# Altium PCB PCB4.PcbDoc (part 1 of 3)
Units mm, origin at the board's own origin, x right, y up, seen from the top; angles counter-clockwise.
Board outline 185.25 x 140.25 mm, 2 copper layers (Top Layer, Bottom Layer); 401 components, 60 nets, 1114 pads, 228 vias.
Unrouted connection lines stored in the file: 2.
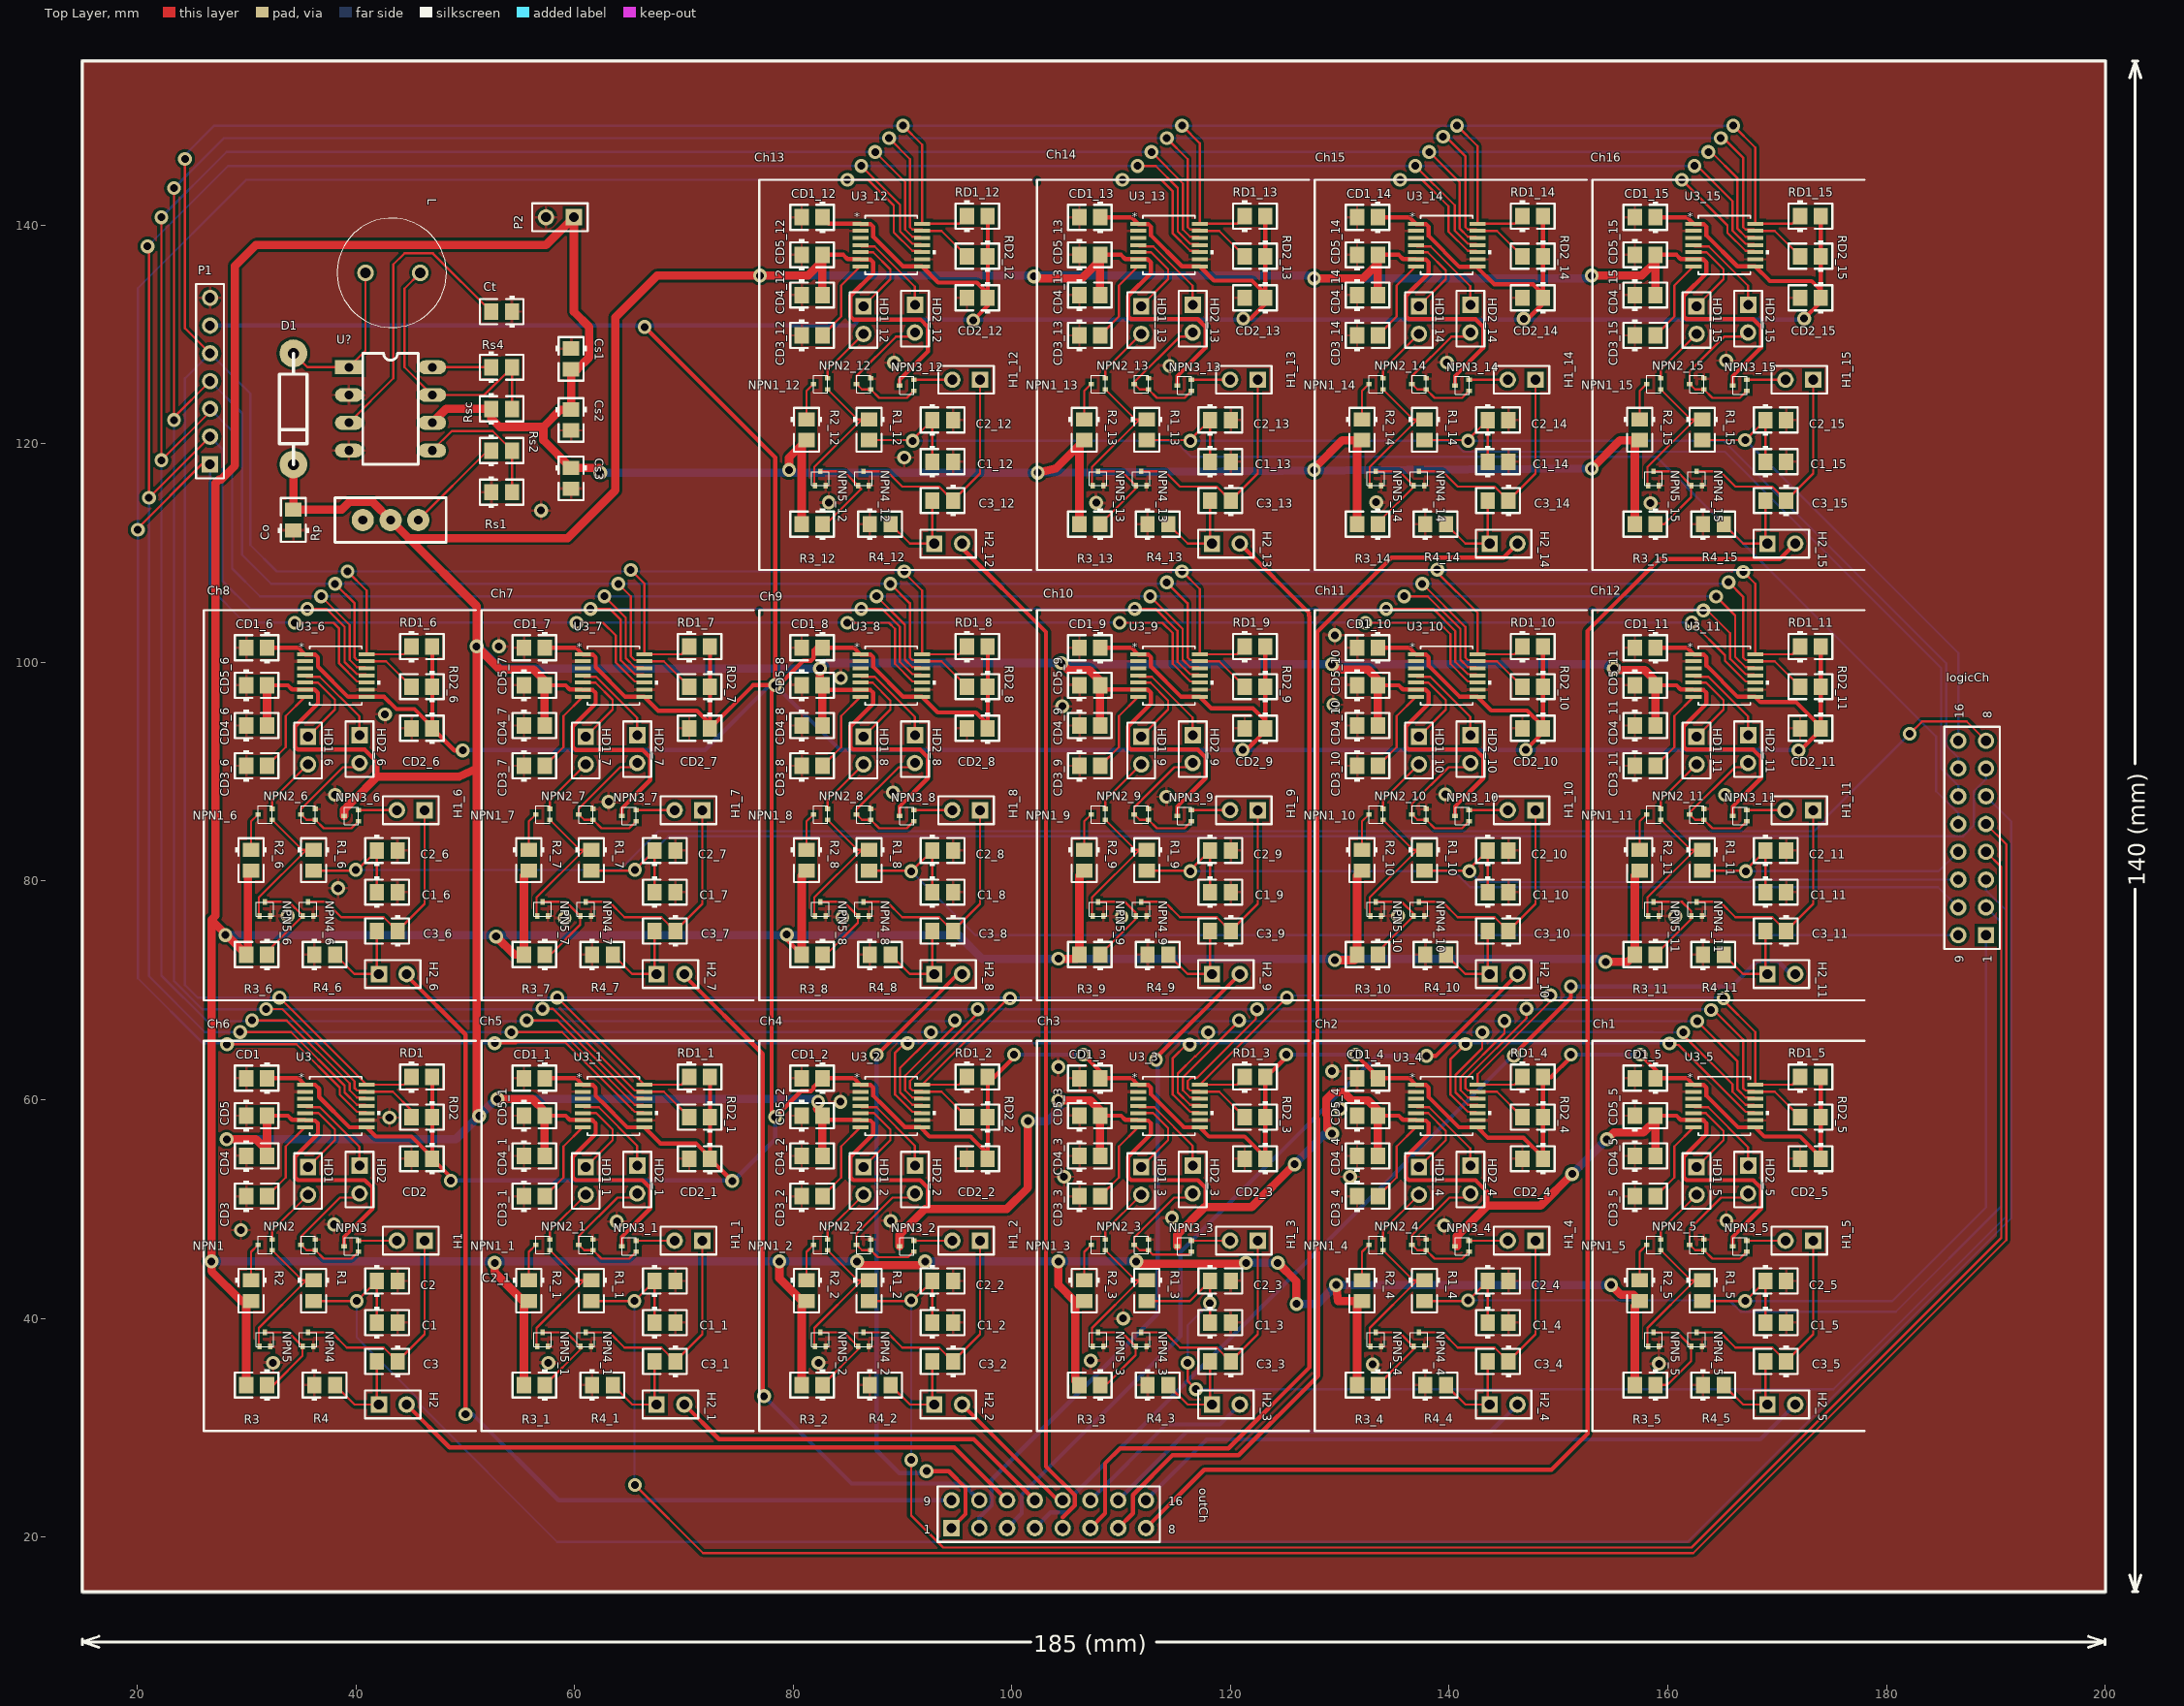
[diagram p0: Top Layer view]
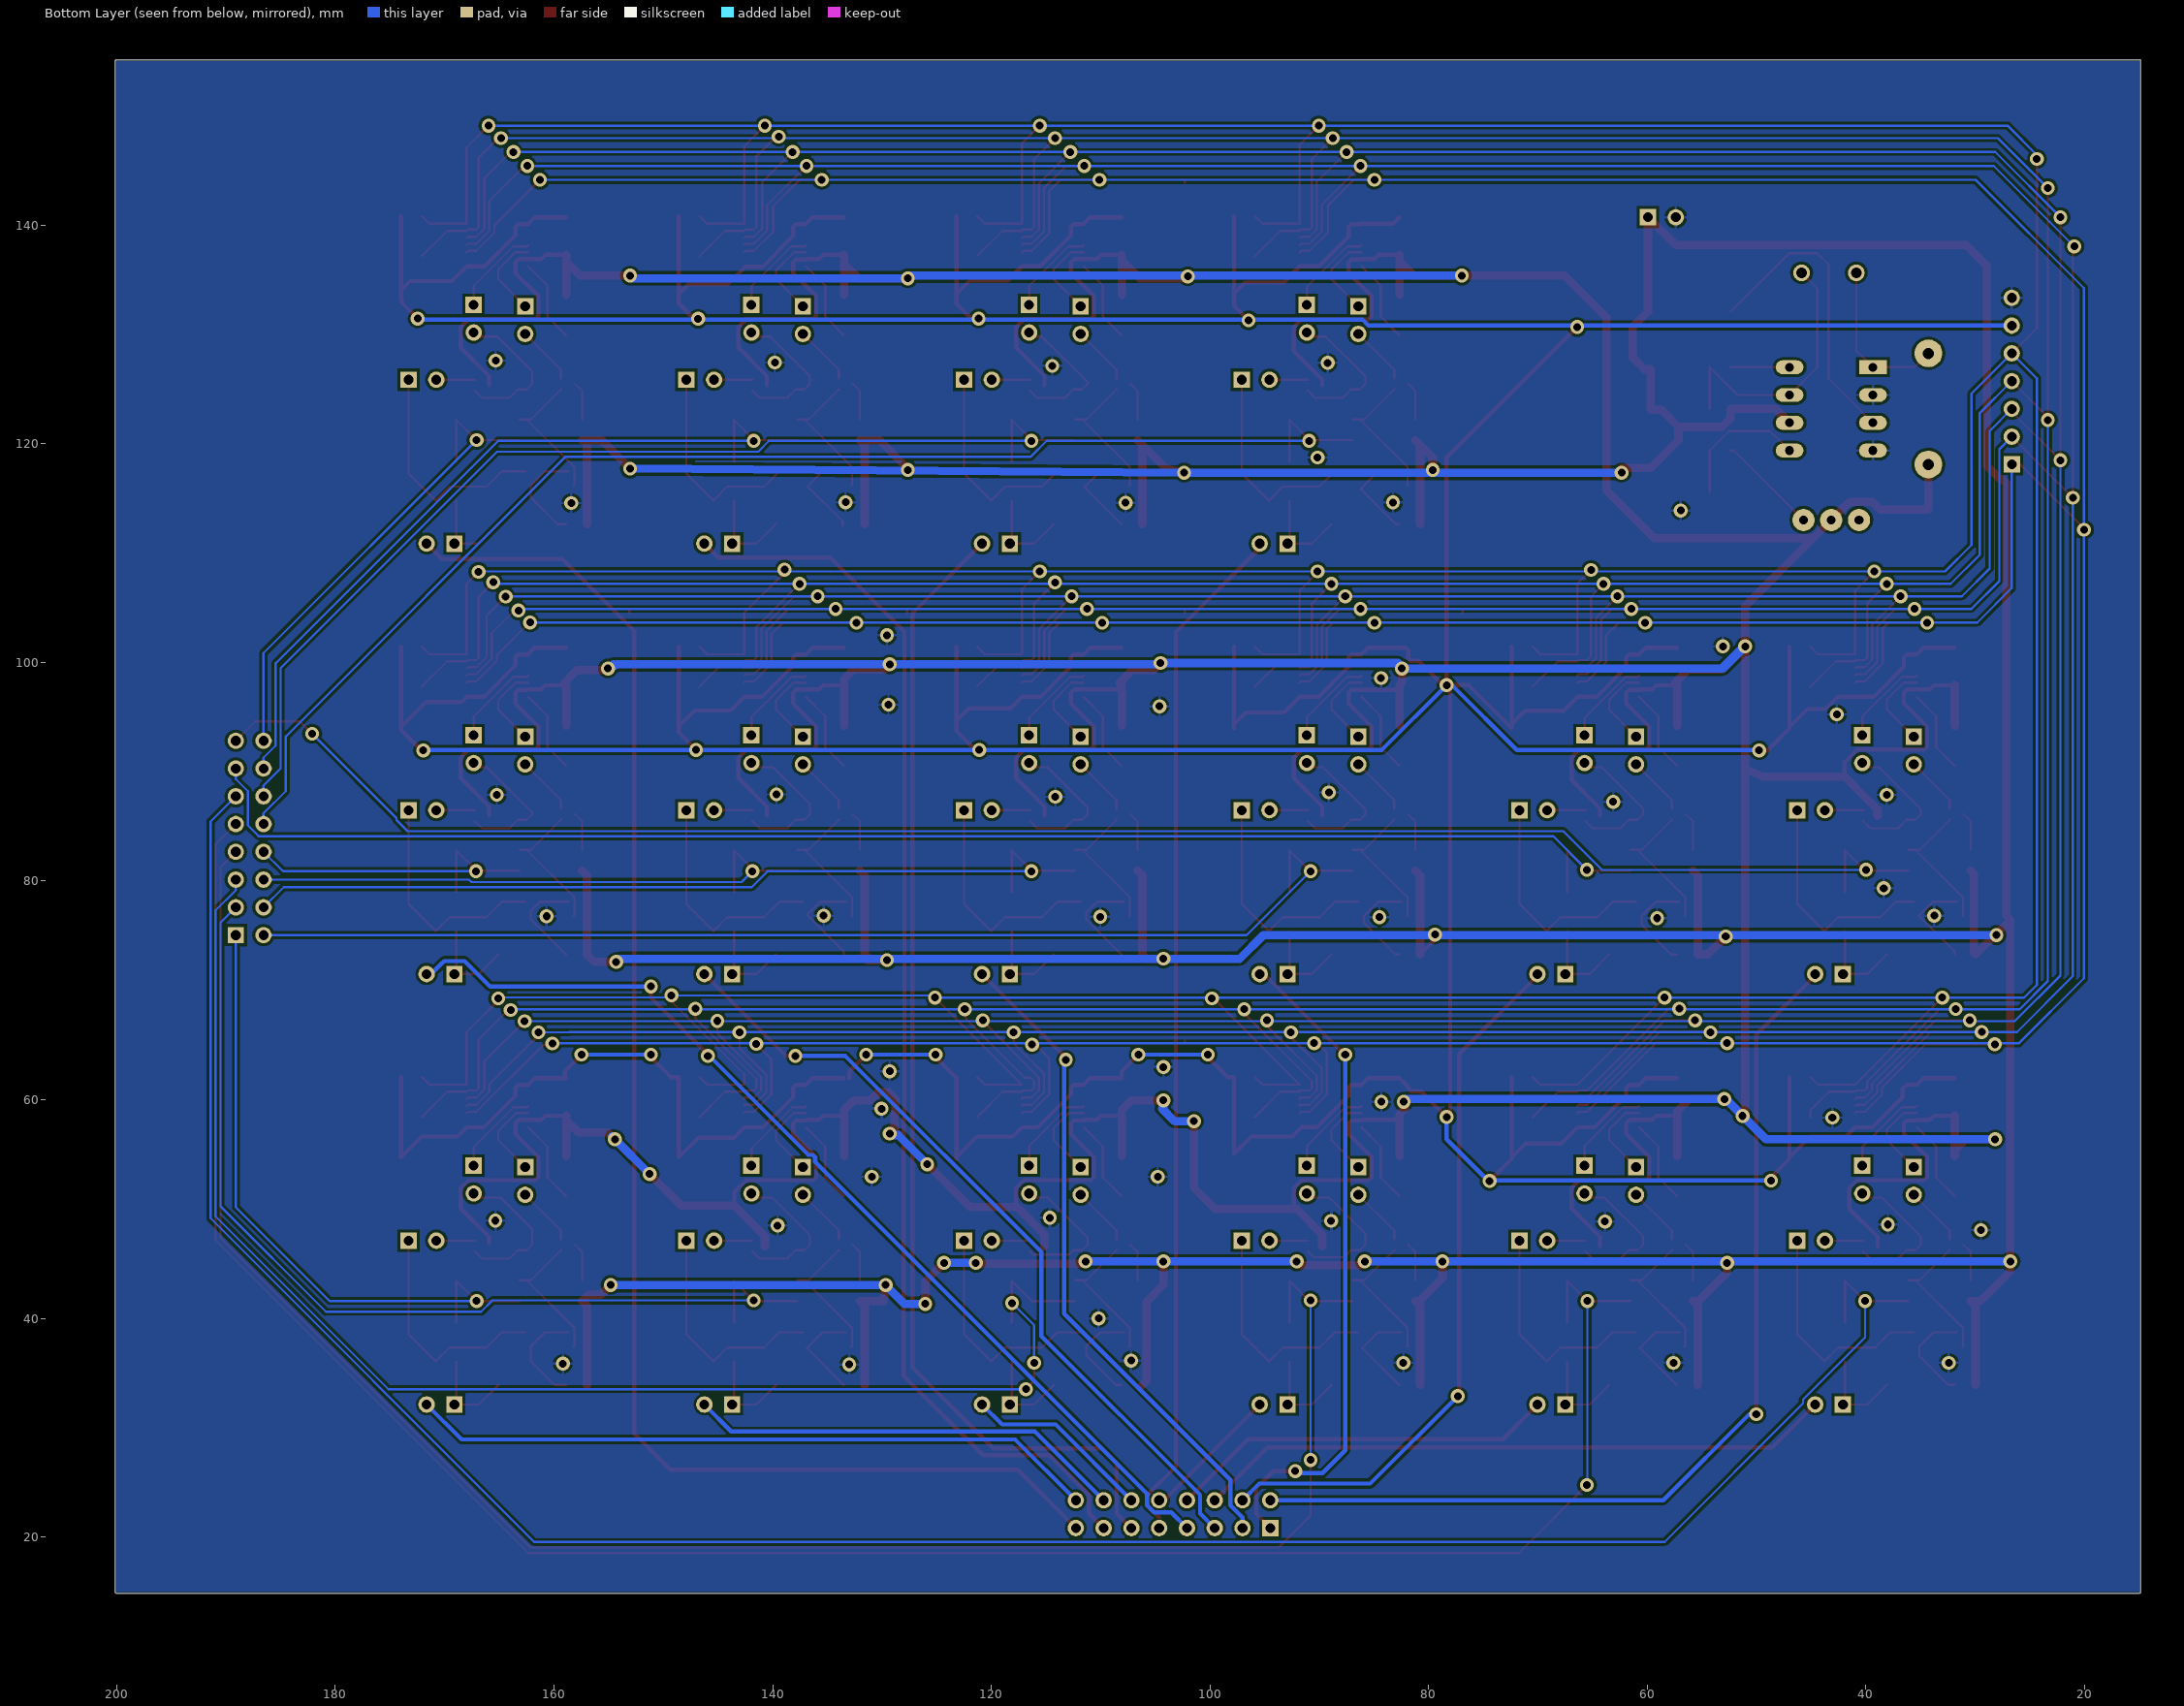
[diagram p1: Bottom Layer view, seen from below]

## Layer stack, top to bottom
Top Solder: solder mask 0.0102, Solder Resist, Dk 3.5
Top Layer: signal copper 0.0356
Dielectric 1: dielectric 0.32, FR-4, Dk 4.8
Bottom Layer: signal copper 0.0356
Bottom Solder: solder mask 0.0102, Solder Resist, Dk 3.5

## Board outline
15,14.873 cw(c15,15) 14.873,15 14.873,155 cw(c15,155) 15,155.127 200,155.127 cw(c200,155) 200.127,155 200.127,15 cw(c200,15) 200,14.873

## Design rules (kind name [scope] priority, off if disabled: settings)
Clearance [All] p1: gap=0.254
PolygonConnect [All] p1: connectstyle=Relief reliefconductorwidth=0.254 reliefentries=4 polygonreliefangle="90 Angle" airgapwidth=0.254
RoutingVias [All] p1: holewidth=0.711 width=1.27 viastyle="Through Hole" minholewidth=0.152 minwidth=1.27 maxholewidth=0.711 maxwidth=1.27
SolderMaskExpansion [All] p1: expansion=0.102
Width [All] p1: maxlimit=0.762 minlimit=0.152 preferedwidth=0.381
30 further rules are at their usual default settings.

## Classes and differential pairs
component class "4nd design": C1 C2 C3 CD1 CD2 CD3 CD4 CD5 H1 H2 HD1 HD2 logicCh NPN1 NPN2 NPN3 NPN4 NPN5 outCh P1 P2 R1 R2 R3 R4 RD1 RD2 U3
component class "Step-Up Converter": Co Cs1 Cs2 Cs3 Ct D1 L Rp Rs1 Rs2 Rs4 Rsc U?

## Components (designator, comment, footprint, x,y, rotation, side; value= is the part's Value field where it differs from the comment)
C1 "Cap-NP" CC2012-0805#1 42.87,39.621 r0 top
C1_1 "Cap-NP" CC2012-0805#1 68.27,39.621 r0 top (schematic designator C1)
C1_2 "Cap-NP" CC2012-0805#1 93.67,39.621 r0 top (schematic designator C1)
C1_3 "Cap-NP" CC2012-0805#1 119.07,39.621 r0 top (schematic designator C1)
C1_4 "Cap-NP" CC2012-0805#1 144.47,39.621 r0 top (schematic designator C1)
C1_5 "Cap-NP" CC2012-0805#1 169.87,39.621 r0 top (schematic designator C1)
C1_6 "Cap-NP" CC2012-0805#1 42.87,78.991 r0 top (schematic designator C1)
C1_7 "Cap-NP" CC2012-0805#1 68.27,78.991 r0 top (schematic designator C1)
C1_8 "Cap-NP" CC2012-0805#1 93.67,78.991 r0 top (schematic designator C1)
C1_9 "Cap-NP" CC2012-0805#1 119.07,78.991 r0 top (schematic designator C1)
C1_10 "Cap-NP" CC2012-0805#1 144.47,78.991 r0 top (schematic designator C1)
C1_11 "Cap-NP" CC2012-0805#1 169.87,78.991 r0 top (schematic designator C1)
C1_12 "Cap-NP" CC2012-0805#2 93.67,118.361 r0 top (schematic designator C1)
C1_13 "Cap-NP" CC2012-0805#1 119.07,118.361 r0 top (schematic designator C1)
C1_14 "Cap-NP" CC2012-0805#1 144.47,118.361 r0 top (schematic designator C1)
C1_15 "Cap-NP" CC2012-0805#1 169.87,118.361 r0 top (schematic designator C1)
C2 "Cap-NP" CC2012-0805#1 42.87,43.431 r0 top
C2_1 "Cap-NP" CC2012-0805#1 68.27,43.431 r0 top (schematic designator C2)
C2_2 "Cap-NP" CC2012-0805#1 93.67,43.431 r0 top (schematic designator C2)
C2_3 "Cap-NP" CC2012-0805#1 119.07,43.431 r0 top (schematic designator C2)
C2_4 "Cap-NP" CC2012-0805#1 144.47,43.431 r0 top (schematic designator C2)
C2_5 "Cap-NP" CC2012-0805#1 169.87,43.431 r0 top (schematic designator C2)
C2_6 "Cap-NP" CC2012-0805#1 42.87,82.801 r0 top (schematic designator C2)
C2_7 "Cap-NP" CC2012-0805#1 68.27,82.801 r0 top (schematic designator C2)
C2_8 "Cap-NP" CC2012-0805#1 93.67,82.801 r0 top (schematic designator C2)
C2_9 "Cap-NP" CC2012-0805#1 119.07,82.801 r0 top (schematic designator C2)
C2_10 "Cap-NP" CC2012-0805#1 144.47,82.801 r0 top (schematic designator C2)
C2_11 "Cap-NP" CC2012-0805#1 169.87,82.801 r0 top (schematic designator C2)
C2_12 "Cap-NP" CC2012-0805#1 93.67,122.171 r0 top (schematic designator C2)
C2_13 "Cap-NP" CC2012-0805#1 119.07,122.171 r0 top (schematic designator C2)
C2_14 "Cap-NP" CC2012-0805#1 144.47,122.171 r0 top (schematic designator C2)
C2_15 "Cap-NP" CC2012-0805#1 169.87,122.171 r0 top (schematic designator C2)
C3 "Cap-NP" CC2012-0805#1 42.87,36.065 r180 top
C3_1 "Cap-NP" CC2012-0805#1 68.27,36.065 r180 top (schematic designator C3)
C3_2 "Cap-NP" CC2012-0805#1 93.67,36.065 r180 top (schematic designator C3)
C3_3 "Cap-NP" CC2012-0805#1 119.07,36.065 r180 top (schematic designator C3)
C3_4 "Cap-NP" CC2012-0805#1 144.47,36.065 r180 top (schematic designator C3)
C3_5 "Cap-NP" CC2012-0805#1 169.87,36.065 r180 top (schematic designator C3)
C3_6 "Cap-NP" CC2012-0805#1 42.87,75.435 r180 top (schematic designator C3)
C3_7 "Cap-NP" CC2012-0805#1 68.27,75.435 r180 top (schematic designator C3)
C3_8 "Cap-NP" CC2012-0805#1 93.67,75.435 r180 top (schematic designator C3)
C3_9 "Cap-NP" CC2012-0805#1 119.07,75.435 r180 top (schematic designator C3)
C3_10 "Cap-NP" CC2012-0805#1 144.47,75.435 r180 top (schematic designator C3)
C3_11 "Cap-NP" CC2012-0805#1 169.87,75.435 r180 top (schematic designator C3)
C3_12 "Cap-NP" CC2012-0805#1 93.67,114.805 r180 top (schematic designator C3)
C3_13 "Cap-NP" CC2012-0805#1 119.07,114.805 r180 top (schematic designator C3)
C3_14 "Cap-NP" CC2012-0805#1 144.47,114.805 r180 top (schematic designator C3)
C3_15 "Cap-NP" CC2012-0805#1 169.87,114.805 r180 top (schematic designator C3)
CD1 "Cap-NP" CC2012-0805#1 30.932,61.973 r180 top
CD1_1 "Cap-NP" CC2012-0805#1 56.332,61.973 r180 top (schematic designator CD1)
CD1_2 "Cap-NP" CC2012-0805#1 81.732,61.973 r180 top (schematic designator CD1)
CD1_3 "Cap-NP" CC2012-0805#1 107.132,61.973 r180 top (schematic designator CD1)
CD1_4 "Cap-NP" CC2012-0805#1 132.532,61.973 r180 top (schematic designator CD1)
CD1_5 "Cap-NP" CC2012-0805#1 157.932,61.973 r180 top (schematic designator CD1)
CD1_6 "Cap-NP" CC2012-0805#1 30.932,101.343 r180 top (schematic designator CD1)
CD1_7 "Cap-NP" CC2012-0805#1 56.332,101.343 r180 top (schematic designator CD1)
CD1_8 "Cap-NP" CC2012-0805#1 81.732,101.343 r180 top (schematic designator CD1)
CD1_9 "Cap-NP" CC2012-0805#1 107.132,101.343 r180 top (schematic designator CD1)
CD1_10 "Cap-NP" CC2012-0805#1 132.532,101.343 r180 top (schematic designator CD1)
CD1_11 "Cap-NP" CC2012-0805#1 157.932,101.343 r180 top (schematic designator CD1)
CD1_12 "Cap-NP" CC2012-0805#1 81.732,140.713 r180 top (schematic designator CD1)
CD1_13 "Cap-NP" CC2012-0805#1 107.132,140.713 r180 top (schematic designator CD1)
CD1_14 "Cap-NP" CC2012-0805#1 132.532,140.713 r180 top (schematic designator CD1)
CD1_15 "Cap-NP" CC2012-0805#1 157.932,140.713 r180 top (schematic designator CD1)
CD2 "Cap-NP" CC2012-0805#1 46.045,54.607 r180 top
CD2_1 "Cap-NP" CC2012-0805#1 71.445,54.607 r180 top (schematic designator CD2)
CD2_2 "Cap-NP" CC2012-0805#1 96.845,54.607 r180 top (schematic designator CD2)
CD2_3 "Cap-NP" CC2012-0805#1 122.245,54.607 r180 top (schematic designator CD2)
CD2_4 "Cap-NP" CC2012-0805#1 147.645,54.607 r180 top (schematic designator CD2)
CD2_5 "Cap-NP" CC2012-0805#1 173.045,54.607 r180 top (schematic designator CD2)
CD2_6 "Cap-NP" CC2012-0805#1 46.045,93.977 r180 top (schematic designator CD2)
CD2_7 "Cap-NP" CC2012-0805#1 71.445,93.977 r180 top (schematic designator CD2)
CD2_8 "Cap-NP" CC2012-0805#1 96.845,93.977 r180 top (schematic designator CD2)
CD2_9 "Cap-NP" CC2012-0805#1 122.245,93.977 r180 top (schematic designator CD2)
CD2_10 "Cap-NP" CC2012-0805#1 147.645,93.977 r180 top (schematic designator CD2)
CD2_11 "Cap-NP" CC2012-0805#1 173.045,93.977 r180 top (schematic designator CD2)
CD2_12 "Cap-NP" CC2012-0805#1 96.845,133.347 r180 top (schematic designator CD2)
CD2_13 "Cap-NP" CC2012-0805#1 122.245,133.347 r180 top (schematic designator CD2)
CD2_14 "Cap-NP" CC2012-0805#1 147.645,133.347 r180 top (schematic designator CD2)
CD2_15 "Cap-NP" CC2012-0805#1 173.045,133.347 r180 top (schematic designator CD2)
CD3 "Cap-NP" CC2012-0805#1 30.932,51.178 r0 top
CD3_1 "Cap-NP" CC2012-0805#1 56.332,51.178 r0 top (schematic designator CD3)
CD3_2 "Cap-NP" CC2012-0805#1 81.732,51.178 r0 top (schematic designator CD3)
CD3_3 "Cap-NP" CC2012-0805#1 107.132,51.178 r0 top (schematic designator CD3)
CD3_4 "Cap-NP" CC2012-0805#1 132.532,51.178 r0 top (schematic designator CD3)
CD3_5 "Cap-NP" CC2012-0805#1 157.932,51.178 r0 top (schematic designator CD3)
CD3_6 "Cap-NP" CC2012-0805#1 30.932,90.548 r0 top (schematic designator CD3)
CD3_7 "Cap-NP" CC2012-0805#1 56.332,90.548 r0 top (schematic designator CD3)
CD3_8 "Cap-NP" CC2012-0805#1 81.732,90.548 r0 top (schematic designator CD3)
CD3_9 "Cap-NP" CC2012-0805#1 107.132,90.548 r0 top (schematic designator CD3)
CD3_10 "Cap-NP" CC2012-0805#1 132.532,90.548 r0 top (schematic designator CD3)
CD3_11 "Cap-NP" CC2012-0805#1 157.932,90.548 r0 top (schematic designator CD3)
CD3_12 "Cap-NP" CC2012-0805#1 81.732,129.918 r0 top (schematic designator CD3)
CD3_13 "Cap-NP" CC2012-0805#1 107.132,129.918 r0 top (schematic designator CD3)
CD3_14 "Cap-NP" CC2012-0805#1 132.532,129.918 r0 top (schematic designator CD3)
CD3_15 "Cap-NP" CC2012-0805#1 157.932,129.918 r0 top (schematic designator CD3)
CD4 "Cap-NP" CC2012-0805#1 30.932,54.861 r0 top
CD4_1 "Cap-NP" CC2012-0805#1 56.332,54.861 r0 top (schematic designator CD4)
CD4_2 "Cap-NP" CC2012-0805#1 81.732,54.861 r0 top (schematic designator CD4)
CD4_3 "Cap-NP" CC2012-0805#1 107.132,54.861 r0 top (schematic designator CD4)
CD4_4 "Cap-NP" CC2012-0805#1 132.532,54.861 r0 top (schematic designator CD4)
CD4_5 "Cap-NP" CC2012-0805#1 157.932,54.861 r0 top (schematic designator CD4)
CD4_6 "Cap-NP" CC2012-0805#1 30.932,94.231 r0 top (schematic designator CD4)
CD4_7 "Cap-NP" CC2012-0805#1 56.332,94.231 r0 top (schematic designator CD4)
CD4_8 "Cap-NP" CC2012-0805#1 81.732,94.231 r0 top (schematic designator CD4)
CD4_9 "Cap-NP" CC2012-0805#1 107.132,94.231 r0 top (schematic designator CD4)
CD4_10 "Cap-NP" CC2012-0805#1 132.532,94.231 r0 top (schematic designator CD4)
CD4_11 "Cap-NP" CC2012-0805#1 157.932,94.231 r0 top (schematic designator CD4)
CD4_12 "Cap-NP" CC2012-0805#1 81.732,133.601 r0 top (schematic designator CD4)
CD4_13 "Cap-NP" CC2012-0805#1 107.132,133.601 r0 top (schematic designator CD4)
CD4_14 "Cap-NP" CC2012-0805#1 132.532,133.601 r0 top (schematic designator CD4)
CD4_15 "Cap-NP" CC2012-0805#1 157.932,133.601 r0 top (schematic designator CD4)
CD5 "Cap-NP" CC2012-0805#1 30.932,58.544 r0 top
CD5_1 "Cap-NP" CC2012-0805#1 56.332,58.544 r0 top (schematic designator CD5)
CD5_2 "Cap-NP" CC2012-0805#1 81.732,58.544 r0 top (schematic designator CD5)
CD5_3 "Cap-NP" CC2012-0805#1 107.132,58.544 r0 top (schematic designator CD5)
CD5_4 "Cap-NP" CC2012-0805#1 132.532,58.544 r0 top (schematic designator CD5)
CD5_5 "Cap-NP" CC2012-0805#1 157.932,58.544 r0 top (schematic designator CD5)
CD5_6 "Cap-NP" CC2012-0805#1 30.932,97.914 r0 top (schematic designator CD5)
CD5_7 "Cap-NP" CC2012-0805#1 56.332,97.914 r0 top (schematic designator CD5)
CD5_8 "Cap-NP" CC2012-0805#1 81.732,97.914 r0 top (schematic designator CD5)
CD5_9 "Cap-NP" CC2012-0805#1 107.132,97.914 r0 top (schematic designator CD5)
CD5_10 "Cap-NP" CC2012-0805#1 132.532,97.914 r0 top (schematic designator CD5)
CD5_11 "Cap-NP" CC2012-0805#1 157.932,97.914 r0 top (schematic designator CD5)
CD5_12 "Cap-NP" CC2012-0805#1 81.732,137.284 r0 top (schematic designator CD5)
CD5_13 "Cap-NP" CC2012-0805#1 107.132,137.284 r0 top (schematic designator CD5)
CD5_14 "Cap-NP" CC2012-0805#1 132.532,137.284 r0 top (schematic designator CD5)
CD5_15 "Cap-NP" CC2012-0805#1 157.932,137.284 r0 top (schematic designator CD5)
Co "Cap-NP" CC2012-0805#1 34.29,113.03 r90 top
Cs1 "Cap-NP" CC2012-0805#1 59.689,127.762 r270 top
Cs2 "Cap-NP" CC2012-0805#1 59.689,122.174 r270 top
Cs3 "Cap-NP" CC2012-0805#1 59.689,116.84 r270 top
Ct "Cap-NP" CC2012-0805#1 53.34,132.08 r180 top
D1 "DIODE" D1N40XX 34.29,118.11 r90 top
H1 "Header 1" HDR1X2 46.299,47.114 r180 top
H1_1 "Header 1" HDR1X2 71.699,47.114 r180 top (schematic designator H1)
H1_2 "Header 1" HDR1X2 97.099,47.114 r180 top (schematic designator H1)
H1_3 "Header 1" HDR1X2 122.499,47.114 r180 top (schematic designator H1)
H1_4 "Header 1" HDR1X2 147.899,47.114 r180 top (schematic designator H1)
H1_5 "Header 1" HDR1X2 173.299,47.114 r180 top (schematic designator H1)
H1_6 "Header 1" HDR1X2 46.299,86.484 r180 top (schematic designator H1)
H1_7 "Header 1" HDR1X2 71.699,86.484 r180 top (schematic designator H1)
H1_8 "Header 1" HDR1X2 97.099,86.484 r180 top (schematic designator H1)
H1_9 "Header 1" HDR1X2 122.499,86.484 r180 top (schematic designator H1)
H1_10 "Header 1" HDR1X2 147.899,86.484 r180 top (schematic designator H1)
H1_11 "Header 1" HDR1X2 173.299,86.484 r180 top (schematic designator H1)
H1_12 "Header 1" HDR1X2 97.099,125.854 r180 top (schematic designator H1)
H1_13 "Header 1" HDR1X2 122.499,125.854 r180 top (schematic designator H1)
H1_14 "Header 1" HDR1X2 147.899,125.854 r180 top (schematic designator H1)
H1_15 "Header 1" HDR1X2 173.299,125.854 r180 top (schematic designator H1)
H2 "Header 2" HDR1X2 42.108,32.128 r0 top
H2_1 "Header 2" HDR1X2 67.508,32.128 r0 top (schematic designator H2)
H2_2 "Header 2" HDR1X2 92.908,32.128 r0 top (schematic designator H2)
H2_3 "Header 2" HDR1X2 118.308,32.128 r0 top (schematic designator H2)
H2_4 "Header 2" HDR1X2 143.708,32.128 r0 top (schematic designator H2)
H2_5 "Header 2" HDR1X2 169.108,32.128 r0 top (schematic designator H2)
H2_6 "Header 2" HDR1X2 42.108,71.498 r0 top (schematic designator H2)
H2_7 "Header 2" HDR1X2 67.508,71.498 r0 top (schematic designator H2)
H2_8 "Header 2" HDR1X2 92.908,71.498 r0 top (schematic designator H2)
H2_9 "Header 2" HDR1X2 118.308,71.498 r0 top (schematic designator H2)
H2_10 "Header 2" HDR1X2 143.708,71.498 r0 top (schematic designator H2)
H2_11 "Header 2" HDR1X2 169.108,71.498 r0 top (schematic designator H2)
H2_12 "Header 2" HDR1X2 92.908,110.868 r0 top (schematic designator H2)
H2_13 "Header 2" HDR1X2 118.308,110.868 r0 top (schematic designator H2)
H2_14 "Header 2" HDR1X2 143.708,110.868 r0 top (schematic designator H2)
H2_15 "Header 2" HDR1X2 169.108,110.868 r0 top (schematic designator H2)
HD1 "HD1" HDR1X2 35.631,53.845 r270 top
HD1_1 "HD1" HDR1X2 61.031,53.845 r270 top (schematic designator HD1)
HD1_2 "HD1" HDR1X2 86.431,53.845 r270 top (schematic designator HD1)
HD1_3 "HD1" HDR1X2 111.831,53.845 r270 top (schematic designator HD1)
HD1_4 "HD1" HDR1X2 137.231,53.845 r270 top (schematic designator HD1)
HD1_5 "HD1" HDR1X2 162.631,53.845 r270 top (schematic designator HD1)
HD1_6 "HD1" HDR1X2 35.631,93.215 r270 top (schematic designator HD1)
HD1_7 "HD1" HDR1X2 61.031,93.215 r270 top (schematic designator HD1)
HD1_8 "HD1" HDR1X2 86.431,93.215 r270 top (schematic designator HD1)
HD1_9 "HD1" HDR1X2 111.831,93.215 r270 top (schematic designator HD1)
HD1_10 "HD1" HDR1X2 137.231,93.215 r270 top (schematic designator HD1)
HD1_11 "HD1" HDR1X2 162.631,93.215 r270 top (schematic designator HD1)
HD1_12 "HD1" HDR1X2 86.431,132.585 r270 top (schematic designator HD1)
HD1_13 "HD1" HDR1X2 111.831,132.585 r270 top (schematic designator HD1)
HD1_14 "HD1" HDR1X2 137.231,132.585 r270 top (schematic designator HD1)
HD1_15 "HD1" HDR1X2 162.631,132.585 r270 top (schematic designator HD1)
HD2 "HD2" HDR1X2 40.342,53.972 r270 top
HD2_1 "HD2" HDR1X2 65.742,53.972 r270 top (schematic designator HD2)
HD2_2 "HD2" HDR1X2 91.142,53.972 r270 top (schematic designator HD2)
HD2_3 "HD2" HDR1X2 116.542,53.972 r270 top (schematic designator HD2)
HD2_4 "HD2" HDR1X2 141.942,53.972 r270 top (schematic designator HD2)
HD2_5 "HD2" HDR1X2 167.342,53.972 r270 top (schematic designator HD2)
HD2_6 "HD2" HDR1X2 40.342,93.342 r270 top (schematic designator HD2)
HD2_7 "HD2" HDR1X2 65.742,93.342 r270 top (schematic designator HD2)
HD2_8 "HD2" HDR1X2 91.142,93.342 r270 top (schematic designator HD2)
HD2_9 "HD2" HDR1X2 116.542,93.342 r270 top (schematic designator HD2)
HD2_10 "HD2" HDR1X2 141.942,93.342 r270 top (schematic designator HD2)
HD2_11 "HD2" HDR1X2 167.342,93.342 r270 top (schematic designator HD2)
HD2_12 "HD2" HDR1X2 91.142,132.712 r270 top (schematic designator HD2)
HD2_13 "HD2" HDR1X2 116.542,132.712 r270 top (schematic designator HD2)
HD2_14 "HD2" HDR1X2 141.942,132.712 r270 top (schematic designator HD2)
HD2_15 "HD2" HDR1X2 167.342,132.712 r270 top (schematic designator HD2)
L "Component_1" PCBComponent_1 40.894,135.636 r0 top
logicCh "Header 8X2A" HDR2X8_CEN 189.103,75.057 r90 top
NPN1 "MMBT3904T" MMBT3904T 31.059,46.733 r90 top
NPN1_1 "MMBT3904T" MMBT3904T 56.459,46.733 r90 top (schematic designator NPN1)
NPN1_2 "MMBT3904T" MMBT3904T 81.859,46.733 r90 top (schematic designator NPN1)
NPN1_3 "MMBT3904T" MMBT3904T 107.259,46.733 r90 top (schematic designator NPN1)
NPN1_4 "MMBT3904T" MMBT3904T 132.659,46.733 r90 top (schematic designator NPN1)
NPN1_5 "MMBT3904T" MMBT3904T 158.059,46.733 r90 top (schematic designator NPN1)
NPN1_6 "MMBT3904T" MMBT3904T 31.059,86.103 r90 top (schematic designator NPN1)
NPN1_7 "MMBT3904T" MMBT3904T 56.459,86.103 r90 top (schematic designator NPN1)
NPN1_8 "MMBT3904T" MMBT3904T 81.859,86.103 r90 top (schematic designator NPN1)
NPN1_9 "MMBT3904T" MMBT3904T 107.259,86.103 r90 top (schematic designator NPN1)
NPN1_10 "MMBT3904T" MMBT3904T 132.659,86.103 r90 top (schematic designator NPN1)
NPN1_11 "MMBT3904T" MMBT3904T 158.059,86.103 r90 top (schematic designator NPN1)
NPN1_12 "MMBT3904T" MMBT3904T 81.859,125.473 r90 top (schematic designator NPN1)
NPN1_13 "MMBT3904T" MMBT3904T 107.259,125.473 r90 top (schematic designator NPN1)
NPN1_14 "MMBT3904T" MMBT3904T 132.659,125.473 r90 top (schematic designator NPN1)
NPN1_15 "MMBT3904T" MMBT3904T 158.059,125.473 r90 top (schematic designator NPN1)
NPN2 "MMBT3904T" MMBT3904T 34.996,46.733 r90 top
NPN2_1 "MMBT3904T" MMBT3904T 60.396,46.733 r90 top (schematic designator NPN2)
NPN2_2 "MMBT3904T" MMBT3904T 85.796,46.733 r90 top (schematic designator NPN2)
NPN2_3 "MMBT3904T" MMBT3904T 111.196,46.733 r90 top (schematic designator NPN2)
NPN2_4 "MMBT3904T" MMBT3904T 136.596,46.733 r90 top (schematic designator NPN2)
NPN2_5 "MMBT3904T" MMBT3904T 161.996,46.733 r90 top (schematic designator NPN2)
NPN2_6 "MMBT3904T" MMBT3904T 34.996,86.103 r90 top (schematic designator NPN2)
NPN2_7 "MMBT3904T" MMBT3904T 60.396,86.103 r90 top (schematic designator NPN2)
NPN2_8 "MMBT3904T" MMBT3904T 85.796,86.103 r90 top (schematic designator NPN2)
NPN2_9 "MMBT3904T" MMBT3904T 111.196,86.103 r90 top (schematic designator NPN2)
NPN2_10 "MMBT3904T" MMBT3904T 136.596,86.103 r90 top (schematic designator NPN2)
NPN2_11 "MMBT3904T" MMBT3904T 161.996,86.103 r90 top (schematic designator NPN2)
NPN2_12 "MMBT3904T" MMBT3904T 85.796,125.473 r90 top (schematic designator NPN2)
NPN2_13 "MMBT3904T" MMBT3904T 111.196,125.473 r90 top (schematic designator NPN2)
NPN2_14 "MMBT3904T" MMBT3904T 136.596,125.473 r90 top (schematic designator NPN2)
NPN2_15 "MMBT3904T" MMBT3904T 161.996,125.473 r90 top (schematic designator NPN2)
NPN3 "MMBT3904T" MMBT3904T 38.933,46.606 r90 top
NPN3_1 "MMBT3904T" MMBT3904T 64.333,46.606 r90 top (schematic designator NPN3)
NPN3_2 "MMBT3904T" MMBT3904T 89.733,46.606 r90 top (schematic designator NPN3)
NPN3_3 "MMBT3904T" MMBT3904T 115.133,46.606 r90 top (schematic designator NPN3)
NPN3_4 "MMBT3904T" MMBT3904T 140.533,46.606 r90 top (schematic designator NPN3)
NPN3_5 "MMBT3904T" MMBT3904T 165.933,46.606 r90 top (schematic designator NPN3)
NPN3_6 "MMBT3904T" MMBT3904T 38.933,85.976 r90 top (schematic designator NPN3)
NPN3_7 "MMBT3904T" MMBT3904T 64.333,85.976 r90 top (schematic designator NPN3)
NPN3_8 "MMBT3904T" MMBT3904T 89.733,85.976 r90 top (schematic designator NPN3)
NPN3_9 "MMBT3904T" MMBT3904T 115.133,85.976 r90 top (schematic designator NPN3)
NPN3_10 "MMBT3904T" MMBT3904T 140.533,85.976 r90 top (schematic designator NPN3)
NPN3_11 "MMBT3904T" MMBT3904T 165.933,85.976 r90 top (schematic designator NPN3)
NPN3_12 "MMBT3904T" MMBT3904T 89.733,125.346 r90 top (schematic designator NPN3)
NPN3_13 "MMBT3904T" MMBT3904T 115.133,125.346 r90 top (schematic designator NPN3)
NPN3_14 "MMBT3904T" MMBT3904T 140.533,125.346 r90 top (schematic designator NPN3)
NPN3_15 "MMBT3904T" MMBT3904T 165.933,125.346 r90 top (schematic designator NPN3)
NPN4 "MMBT3904T" MMBT3904T 35.631,38.732 r0 top
NPN4_1 "MMBT3904T" MMBT3904T 61.031,38.732 r0 top (schematic designator NPN4)
NPN4_2 "MMBT3904T" MMBT3904T 86.431,38.732 r0 top (schematic designator NPN4)
NPN4_3 "MMBT3904T" MMBT3904T 111.831,38.732 r0 top (schematic designator NPN4)
NPN4_4 "MMBT3904T" MMBT3904T 137.231,38.732 r0 top (schematic designator NPN4)
NPN4_5 "MMBT3904T" MMBT3904T 162.631,38.732 r0 top (schematic designator NPN4)
NPN4_6 "MMBT3904T" MMBT3904T 35.631,78.102 r0 top (schematic designator NPN4)
NPN4_7 "MMBT3904T" MMBT3904T 61.031,78.102 r0 top (schematic designator NPN4)
NPN4_8 "MMBT3904T" MMBT3904T 86.431,78.102 r0 top (schematic designator NPN4)
NPN4_9 "MMBT3904T" MMBT3904T 111.831,78.102 r0 top (schematic designator NPN4)
NPN4_10 "MMBT3904T" MMBT3904T 137.231,78.102 r0 top (schematic designator NPN4)
NPN4_11 "MMBT3904T" MMBT3904T 162.631,78.102 r0 top (schematic designator NPN4)
NPN4_12 "MMBT3904T" MMBT3904T 86.431,117.472 r0 top (schematic designator NPN4)
NPN4_13 "MMBT3904T" MMBT3904T 111.831,117.472 r0 top (schematic designator NPN4)
NPN4_14 "MMBT3904T" MMBT3904T 137.231,117.472 r0 top (schematic designator NPN4)
NPN4_15 "MMBT3904T" MMBT3904T 162.631,117.472 r0 top (schematic designator NPN4)
NPN5 "MMBT3904T" MMBT3904T 31.694,38.732 r0 top
NPN5_1 "MMBT3904T" MMBT3904T 57.094,38.732 r0 top (schematic designator NPN5)
NPN5_2 "MMBT3904T" MMBT3904T 82.494,38.732 r0 top (schematic designator NPN5)
NPN5_3 "MMBT3904T" MMBT3904T 107.894,38.732 r0 top (schematic designator NPN5)
NPN5_4 "MMBT3904T" MMBT3904T 133.294,38.732 r0 top (schematic designator NPN5)
NPN5_5 "MMBT3904T" MMBT3904T 158.694,38.732 r0 top (schematic designator NPN5)
NPN5_6 "MMBT3904T" MMBT3904T 31.694,78.102 r0 top (schematic designator NPN5)
NPN5_7 "MMBT3904T" MMBT3904T 57.094,78.102 r0 top (schematic designator NPN5)
NPN5_8 "MMBT3904T" MMBT3904T 82.494,78.102 r0 top (schematic designator NPN5)
NPN5_9 "MMBT3904T" MMBT3904T 107.894,78.102 r0 top (schematic designator NPN5)
NPN5_10 "MMBT3904T" MMBT3904T 133.294,78.102 r0 top (schematic designator NPN5)
NPN5_11 "MMBT3904T" MMBT3904T 158.694,78.102 r0 top (schematic designator NPN5)
NPN5_12 "MMBT3904T" MMBT3904T 82.494,117.472 r0 top (schematic designator NPN5)
NPN5_13 "MMBT3904T" MMBT3904T 107.894,117.472 r0 top (schematic designator NPN5)
NPN5_14 "MMBT3904T" MMBT3904T 133.294,117.472 r0 top (schematic designator NPN5)
NPN5_15 "MMBT3904T" MMBT3904T 158.694,117.472 r0 top (schematic designator NPN5)
outCh "Header 8X2A" HDR2X8_CEN 94.488,20.828 r0 top
P1 "Header 7" HDR1X7 26.67,118.11 r90 top
P2 "Header 2" HDR1X2 59.944,140.716 r180 top
R1 "Res" CC2012-0805#1 36.139,42.542 r270 top
R1_1 "Res" CC2012-0805#1 61.539,42.542 r270 top (schematic designator R1)
R1_2 "Res" CC2012-0805#1 86.939,42.542 r270 top (schematic designator R1)
R1_3 "Res" CC2012-0805#1 112.339,42.542 r270 top (schematic designator R1)
R1_4 "Res" CC2012-0805#1 137.739,42.542 r270 top (schematic designator R1)
R1_5 "Res" CC2012-0805#1 163.139,42.542 r270 top (schematic designator R1)
R1_6 "Res" CC2012-0805#1 36.139,81.912 r270 top (schematic designator R1)
R1_7 "Res" CC2012-0805#1 61.539,81.912 r270 top (schematic designator R1)
R1_8 "Res" CC2012-0805#1 86.939,81.912 r270 top (schematic designator R1)
R1_9 "Res" CC2012-0805#1 112.339,81.912 r270 top (schematic designator R1)
R1_10 "Res" CC2012-0805#1 137.739,81.912 r270 top (schematic designator R1)
R1_11 "Res" CC2012-0805#1 163.139,81.912 r270 top (schematic designator R1)
R1_12 "Res" CC2012-0805#1 86.939,121.282 r270 top (schematic designator R1)
R1_13 "Res" CC2012-0805#1 112.339,121.282 r270 top (schematic designator R1)
R1_14 "Res" CC2012-0805#1 137.739,121.282 r270 top (schematic designator R1)
R1_15 "Res" CC2012-0805#1 163.139,121.282 r270 top (schematic designator R1)
R2 "Res" CC2012-0805#1 30.424,42.542 r270 top
R2_1 "Res" CC2012-0805#1 55.824,42.542 r270 top (schematic designator R2)
R2_2 "Res" CC2012-0805#1 81.224,42.542 r270 top (schematic designator R2)
R2_3 "Res" CC2012-0805#1 106.624,42.542 r270 top (schematic designator R2)
R2_4 "Res" CC2012-0805#1 132.024,42.542 r270 top (schematic designator R2)
R2_5 "Res" CC2012-0805#1 157.424,42.542 r270 top (schematic designator R2)
R2_6 "Res" CC2012-0805#1 30.424,81.912 r270 top (schematic designator R2)
R2_7 "Res" CC2012-0805#1 55.824,81.912 r270 top (schematic designator R2)
R2_8 "Res" CC2012-0805#1 81.224,81.912 r270 top (schematic designator R2)
R2_9 "Res" CC2012-0805#1 106.624,81.912 r270 top (schematic designator R2)
R2_10 "Res" CC2012-0805#1 132.024,81.912 r270 top (schematic designator R2)
R2_11 "Res" CC2012-0805#1 157.424,81.912 r270 top (schematic designator R2)
R2_12 "Res" CC2012-0805#1 81.224,121.282 r270 top (schematic designator R2)
R2_13 "Res" CC2012-0805#1 106.624,121.282 r270 top (schematic designator R2)
R2_14 "Res" CC2012-0805#1 132.024,121.282 r270 top (schematic designator R2)
R2_15 "Res" CC2012-0805#1 157.424,121.282 r270 top (schematic designator R2)
R3 "Res" CC2012-0805#1 30.932,33.906 r180 top
R3_1 "Res" CC2012-0805#1 56.332,33.906 r180 top (schematic designator R3)
R3_2 "Res" CC2012-0805#1 81.732,33.906 r180 top (schematic designator R3)
R3_3 "Res" CC2012-0805#1 107.132,33.906 r180 top (schematic designator R3)
R3_4 "Res" CC2012-0805#1 132.532,33.906 r180 top (schematic designator R3)
R3_5 "Res" CC2012-0805#1 157.932,33.906 r180 top (schematic designator R3)
R3_6 "Res" CC2012-0805#1 30.932,73.276 r180 top (schematic designator R3)
R3_7 "Res" CC2012-0805#1 56.332,73.276 r180 top (schematic designator R3)
R3_8 "Res" CC2012-0805#1 81.732,73.276 r180 top (schematic designator R3)
R3_9 "Res" CC2012-0805#1 107.132,73.276 r180 top (schematic designator R3)
R3_10 "Res" CC2012-0805#1 132.532,73.276 r180 top (schematic designator R3)
R3_11 "Res" CC2012-0805#1 157.932,73.276 r180 top (schematic designator R3)
R3_12 "Res" CC2012-0805#1 81.732,112.646 r180 top (schematic designator R3)
R3_13 "Res" CC2012-0805#1 107.132,112.646 r180 top (schematic designator R3)
R3_14 "Res" CC2012-0805#1 132.532,112.646 r180 top (schematic designator R3)
R3_15 "Res" CC2012-0805#1 157.932,112.646 r180 top (schematic designator R3)
R4 "Res" CC2012-0805#1 37.155,33.906 r0 top
R4_1 "Res" CC2012-0805#1 62.555,33.906 r0 top (schematic designator R4)
R4_2 "Res" CC2012-0805#1 87.955,33.906 r0 top (schematic designator R4)
R4_3 "Res" CC2012-0805#1 113.355,33.906 r0 top (schematic designator R4)
R4_4 "Res" CC2012-0805#1 138.755,33.906 r0 top (schematic designator R4)
R4_5 "Res" CC2012-0805#1 164.155,33.906 r0 top (schematic designator R4)
R4_6 "Res" CC2012-0805#1 37.155,73.276 r0 top (schematic designator R4)
R4_7 "Res" CC2012-0805#1 62.555,73.276 r0 top (schematic designator R4)
R4_8 "Res" CC2012-0805#1 87.955,73.276 r0 top (schematic designator R4)
R4_9 "Res" CC2012-0805#1 113.355,73.276 r0 top (schematic designator R4)
R4_10 "Res" CC2012-0805#1 138.755,73.276 r0 top (schematic designator R4)
R4_11 "Res" CC2012-0805#1 164.155,73.276 r0 top (schematic designator R4)
R4_12 "Res" CC2012-0805#1 87.955,112.646 r0 top (schematic designator R4)
R4_13 "Res" CC2012-0805#1 113.355,112.646 r0 top (schematic designator R4)
R4_14 "Res" CC2012-0805#1 138.755,112.646 r0 top (schematic designator R4)
R4_15 "Res" CC2012-0805#1 164.155,112.646 r0 top (schematic designator R4)
RD1 "Res" CC2012-0805#1 46.045,62.079 r0 top
RD1_1 "Res" CC2012-0805#1 71.445,62.079 r0 top (schematic designator RD1)
RD1_2 "Res" CC2012-0805#1 96.845,62.079 r0 top (schematic designator RD1)
RD1_3 "Res" CC2012-0805#1 122.245,62.079 r0 top (schematic designator RD1)
RD1_4 "Res" CC2012-0805#1 147.645,62.079 r0 top (schematic designator RD1)
RD1_5 "Res" CC2012-0805#1 173.045,62.079 r0 top (schematic designator RD1)
RD1_6 "Res" CC2012-0805#1 46.045,101.449 r0 top (schematic designator RD1)
RD1_7 "Res" CC2012-0805#1 71.445,101.449 r0 top (schematic designator RD1)
RD1_8 "Res" CC2012-0805#1 96.845,101.449 r0 top (schematic designator RD1)
RD1_9 "Res" CC2012-0805#1 122.245,101.449 r0 top (schematic designator RD1)
RD1_10 "Res" CC2012-0805#1 147.645,101.449 r0 top (schematic designator RD1)
RD1_11 "Res" CC2012-0805#1 173.045,101.449 r0 top (schematic designator RD1)
RD1_12 "Res" CC2012-0805#1 96.845,140.819 r0 top (schematic designator RD1)
RD1_13 "Res" CC2012-0805#1 122.245,140.819 r0 top (schematic designator RD1)
RD1_14 "Res" CC2012-0805#1 147.645,140.819 r0 top (schematic designator RD1)
RD1_15 "Res" CC2012-0805#1 173.045,140.819 r0 top (schematic designator RD1)
RD2 "Res" CC2012-0805#1 46.045,58.417 r180 top
RD2_1 "Res" CC2012-0805#1 71.445,58.417 r180 top (schematic designator RD2)
RD2_2 "Res" CC2012-0805#1 96.845,58.417 r180 top (schematic designator RD2)
RD2_3 "Res" CC2012-0805#1 122.245,58.417 r180 top (schematic designator RD2)
RD2_4 "Res" CC2012-0805#1 147.645,58.417 r180 top (schematic designator RD2)
RD2_5 "Res" CC2012-0805#1 173.045,58.417 r180 top (schematic designator RD2)
RD2_6 "Res" CC2012-0805#1 46.045,97.787 r180 top (schematic designator RD2)
RD2_7 "Res" CC2012-0805#1 71.445,97.787 r180 top (schematic designator RD2)
RD2_8 "Res" CC2012-0805#1 96.845,97.787 r180 top (schematic designator RD2)
RD2_9 "Res" CC2012-0805#1 122.245,97.787 r180 top (schematic designator RD2)
RD2_10 "Res" CC2012-0805#1 147.645,97.787 r180 top (schematic designator RD2)
RD2_11 "Res" CC2012-0805#1 173.045,97.787 r180 top (schematic designator RD2)
RD2_12 "Res" CC2012-0805#1 96.845,137.157 r180 top (schematic designator RD2)
RD2_13 "Res" CC2012-0805#1 122.245,137.157 r180 top (schematic designator RD2)
RD2_14 "Res" CC2012-0805#1 147.645,137.157 r180 top (schematic designator RD2)
RD2_15 "Res" CC2012-0805#1 173.045,137.157 r180 top (schematic designator RD2)
Rp "RPot" VR_MUL-V 43.18,113.03 r180 top
Rs1 "Res" CC2012-0805#1 53.34,115.57 r0 top
Rs2 "Res" CC2012-0805#1 53.34,119.38 r0 top
Rs4 "Res" CC2012-0805#1 53.34,127 r0 top
Rsc "Res" CC2012-0805#1 53.34,123.19 r0 top
U3 "AD5292BRUZ-100-N" RU_14 38.171,59.433 r0 top
U3_1 "AD5292BRUZ-100-N" RU_14 63.571,59.433 r0 top (schematic designator U3)
U3_2 "AD5292BRUZ-100-N" RU_14 88.971,59.433 r0 top (schematic designator U3)
U3_3 "AD5292BRUZ-100-N" RU_14 114.371,59.433 r0 top (schematic designator U3)
U3_4 "AD5292BRUZ-100-N" RU_14 139.771,59.433 r0 top (schematic designator U3)
U3_5 "AD5292BRUZ-100-N" RU_14 165.171,59.433 r0 top (schematic designator U3)
U3_6 "AD5292BRUZ-100-N" RU_14 38.171,98.803 r0 top (schematic designator U3)
U3_7 "AD5292BRUZ-100-N" RU_14 63.571,98.803 r0 top (schematic designator U3)
U3_8 "AD5292BRUZ-100-N" RU_14 88.971,98.803 r0 top (schematic designator U3)
U3_9 "AD5292BRUZ-100-N" RU_14 114.371,98.803 r0 top (schematic designator U3)
U3_10 "AD5292BRUZ-100-N" RU_14 139.771,98.803 r0 top (schematic designator U3)
U3_11 "AD5292BRUZ-100-N" RU_14 165.171,98.803 r0 top (schematic designator U3)
U3_12 "AD5292BRUZ-100-N" RU_14 88.971,138.173 r0 top (schematic designator U3)
U3_13 "AD5292BRUZ-100-N" RU_14 114.371,138.173 r0 top (schematic designator U3)
U3_14 "AD5292BRUZ-100-N" RU_14 139.771,138.173 r0 top (schematic designator U3)
U3_15 "AD5292BRUZ-100-N" RU_14 165.171,138.173 r0 top (schematic designator U3)
U? "DS1307" DIP8L 43.18,123.19 r0 top

## Footprints (in the part's own frame and the unit in brackets; to place one, negate y for a bottom-side part, rotate by r counter-clockwise, add the part's x,y. Pads: shape width x height; smd on the part's side, far side on the other; paste and mask are expansions set on the pad)
CC2012-0805#1 [mm]
  rect 1.3x1.5 smd: 1(-0.95,0) 2(0.95,0)
  silkscreen extent -2,-1.45 2,1.44
CC2012-0805#2 [mm]
  rect 1.3x1.5 smd: 1(-0.95,0)
  rect 1.3x1.5 smd paste+0: 2(0.95,0)
  silkscreen extent -2,-1.45 2,1.44
D1N40XX [mil]
  round 100 hole 40: 1(0,0) 2(400,0)
  silkscreen extent 0,-50 400,50
DIP8L [mil]
  rect 100x50 hole 32: 1(-150,150)
  oval 100x50 hole 32: 2(-150,50) 3(-150,-50) 4(-150,-150) 5(150,-150) 6(150,-50) 7(150,50) 8(150,150)
  silkscreen extent -100,-200 100,200
HDR1X2 [mm] "Connector; Header; 2 Position"
  rect 1.5x1.5 hole 0.9: 1(0,0)
  round 1.5 hole 0.9: 2(2.54,0)
  silkscreen extent -1.27,-1.27 3.81,1.27
HDR1X7 [mm] "Connector; Header; 7 Position"
  rect 1.5x1.5 hole 0.9: 1(0,0)
  round 1.5 hole 0.9: 2(2.54,0) 3(5.08,0) 4(7.62,0) 5(10.16,0) 6(12.7,0) 7(15.24,0)
  silkscreen extent -1.27,-1.27 16.51,1.27
HDR2X8_CEN [mm] "Connector; Header; 8x2 Position"
  rect 1.5x1.5 hole 0.9: 1(0,0)
  round 1.5 hole 0.9: 2(2.54,0) 3(5.08,0) 4(7.62,0) 5(10.16,0) 6(12.7,0) 7(15.24,0) 8(17.78,0) 9(0,2.54) 10(2.54,2.54) 11(5.08,2.54) 12(7.62,2.54) 13(10.16,2.54) 14(12.7,2.54) 15(15.24,2.54) 16(17.78,2.54)
  silkscreen extent -1.27,-1.27 19.05,3.81
MMBT3904T [mm] "NPN"
  rect 0.4x0.51 smd: 1(0,0) 2(-0.5,-1.3) 3(0.5,-1.3)
  silkscreen extent -0.8,-1.3 0.8,-0.03
PCBComponent_1 [mil]
  round 60 hole 39.37: 1(0,0) 2(196.85,0)
  silkscreen extent -102,-197 291,197
RU_14 [mil]
  rect 58x14 smd paste+0 mask+0: 1(-111,76.77) 2(-111,51.18) 3(-111,25.59) 4(-111,0) 5(-111,-25.59) 6(-111,-51.18) 7(-111,-76.77) 8(111,-76.77) 9(111,-51.18) 10(111,-25.59) 11(111,0) 12(111,25.59) 13(111,51.18) 14(111,76.77)
  silkscreen extent -94,-106 160,106, body extent 0,0 10,10, height 10
VR_MUL-V [mil]
  round 80 hole 32: 1(-100,0) 2(0,0) 3(100,0)
  silkscreen extent -200,-80 200,80